# Altium PCB PCB1.PcbDoc (part 1 of 3)
Units mm, origin at the board's own origin, x right, y up, seen from the top; angles counter-clockwise.
Board outline 160 x 120 mm, 2 copper layers (Top Layer, Bottom Layer), stack 1.575 mm thick; 297 components, 194 nets, 893 pads, 504 vias.
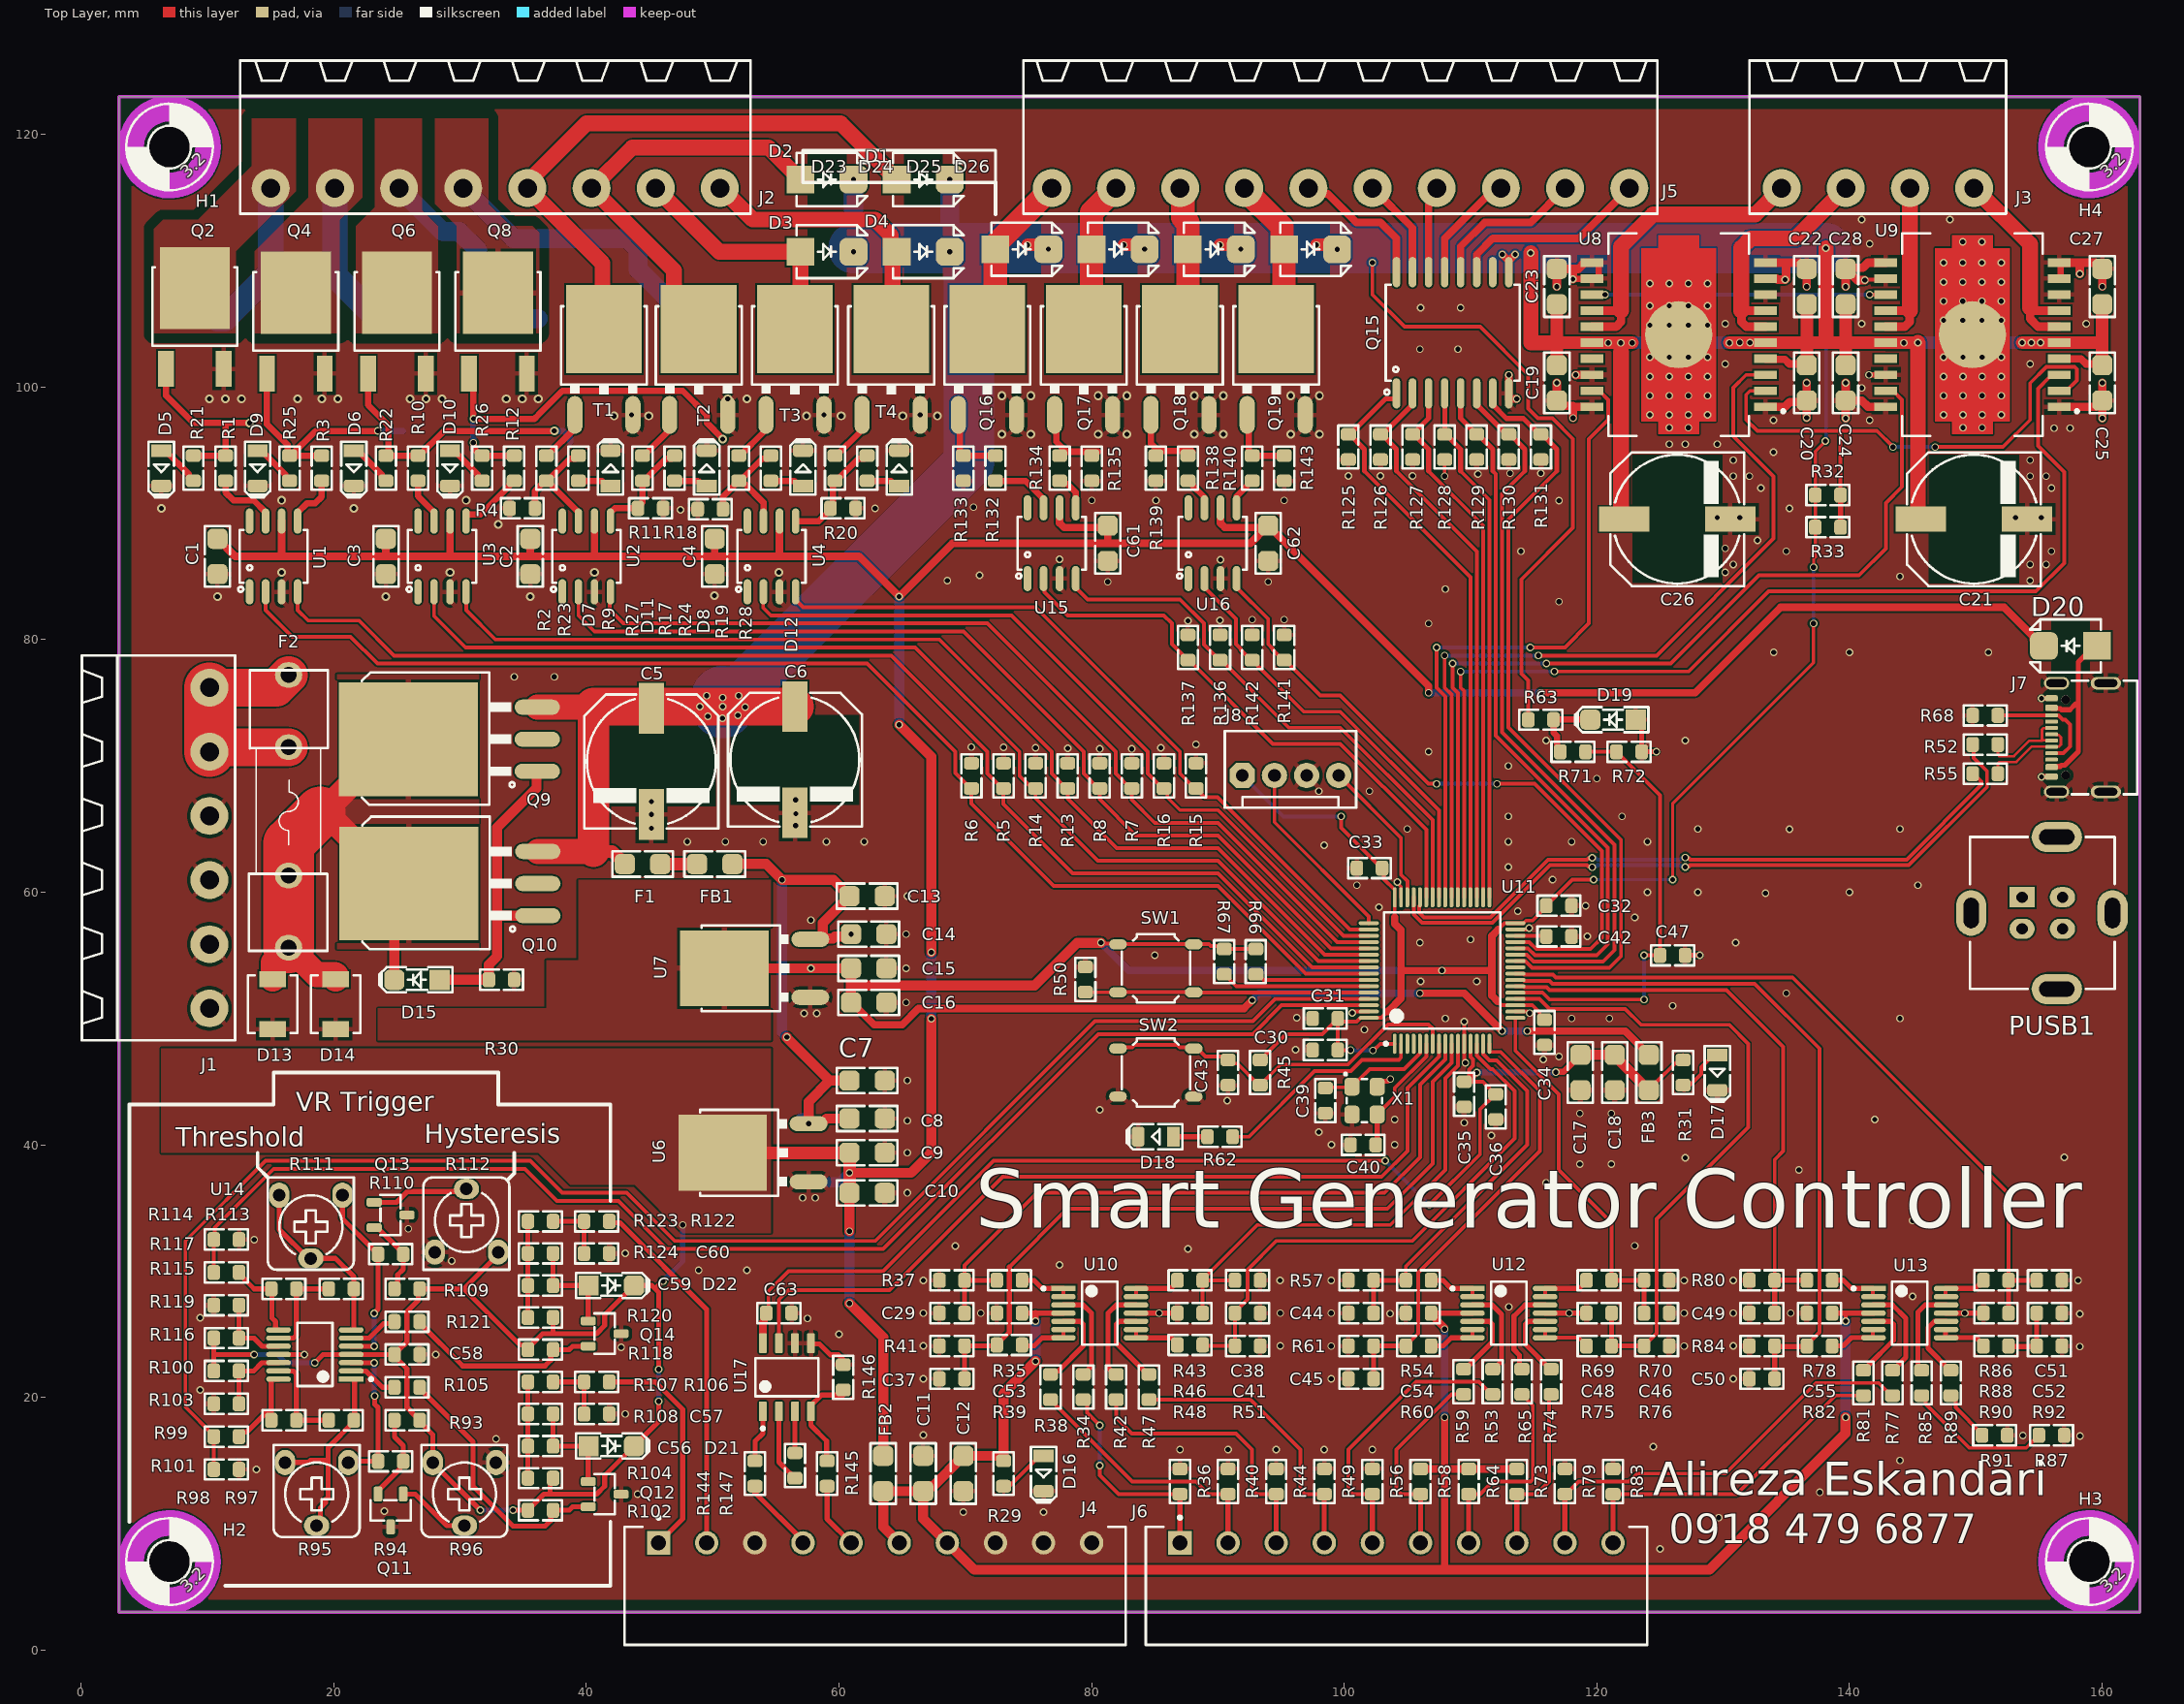
[diagram p0: Top Layer view]
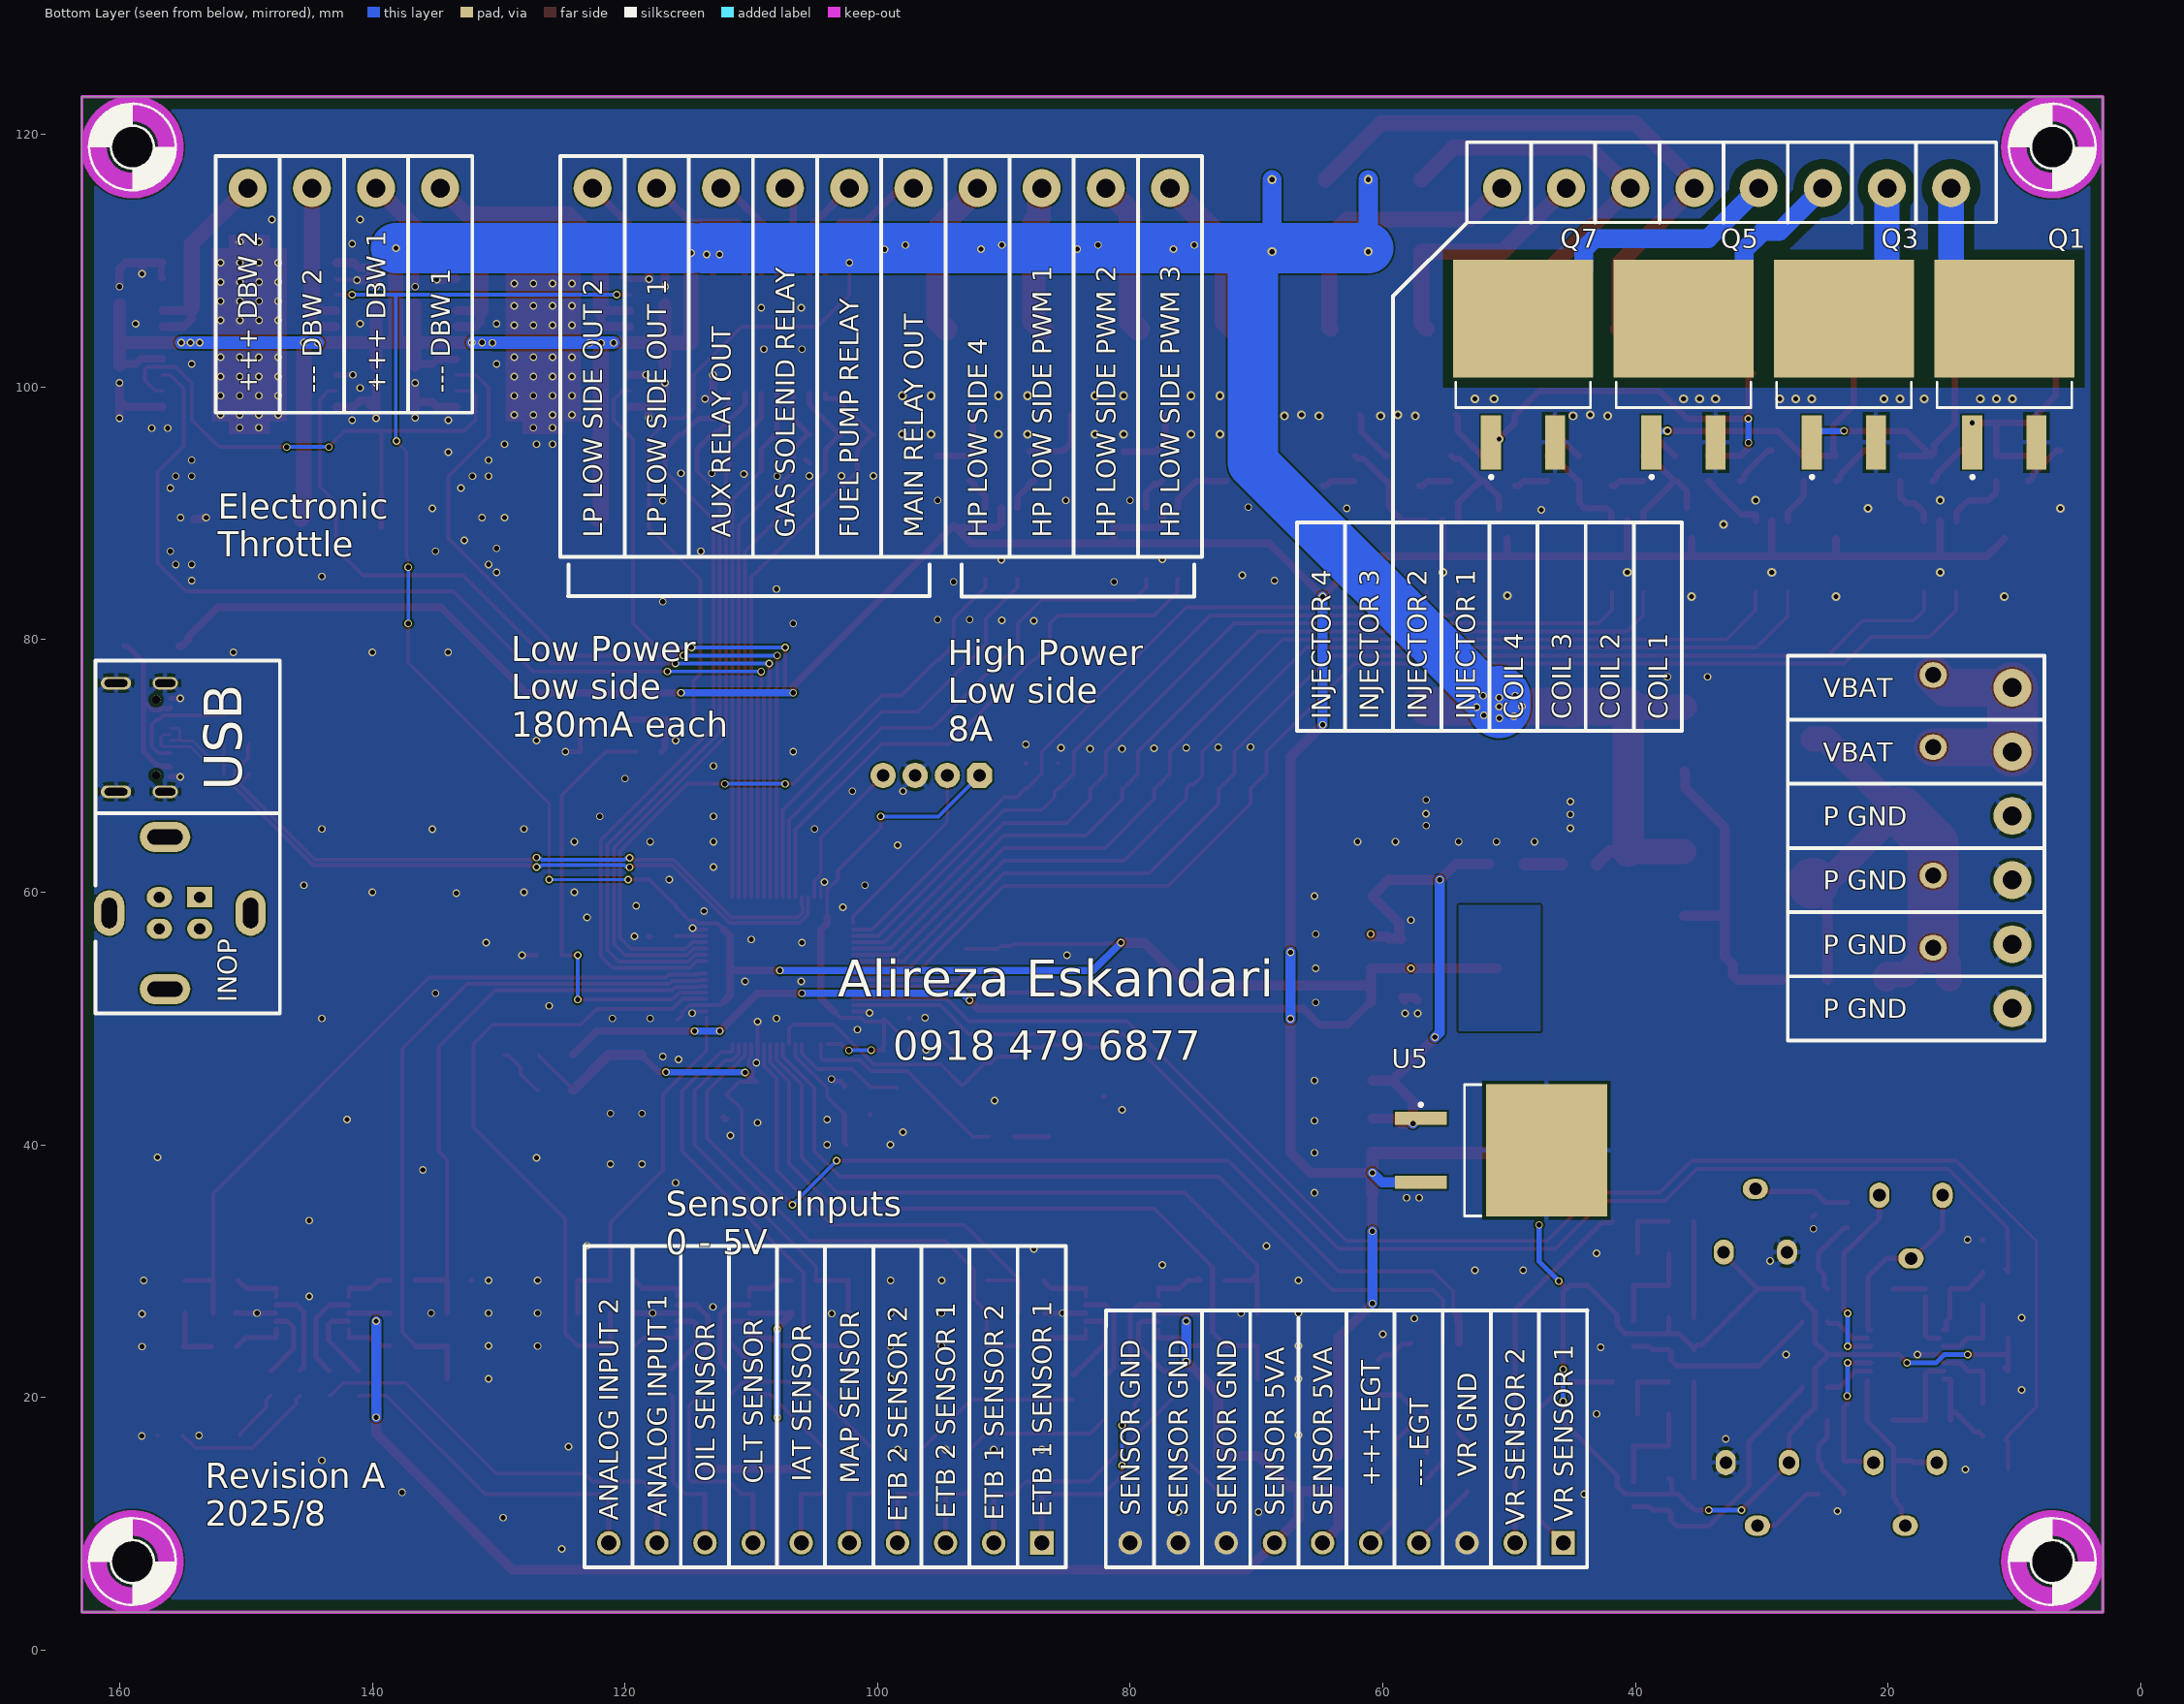
[diagram p1: Bottom Layer view, seen from below]
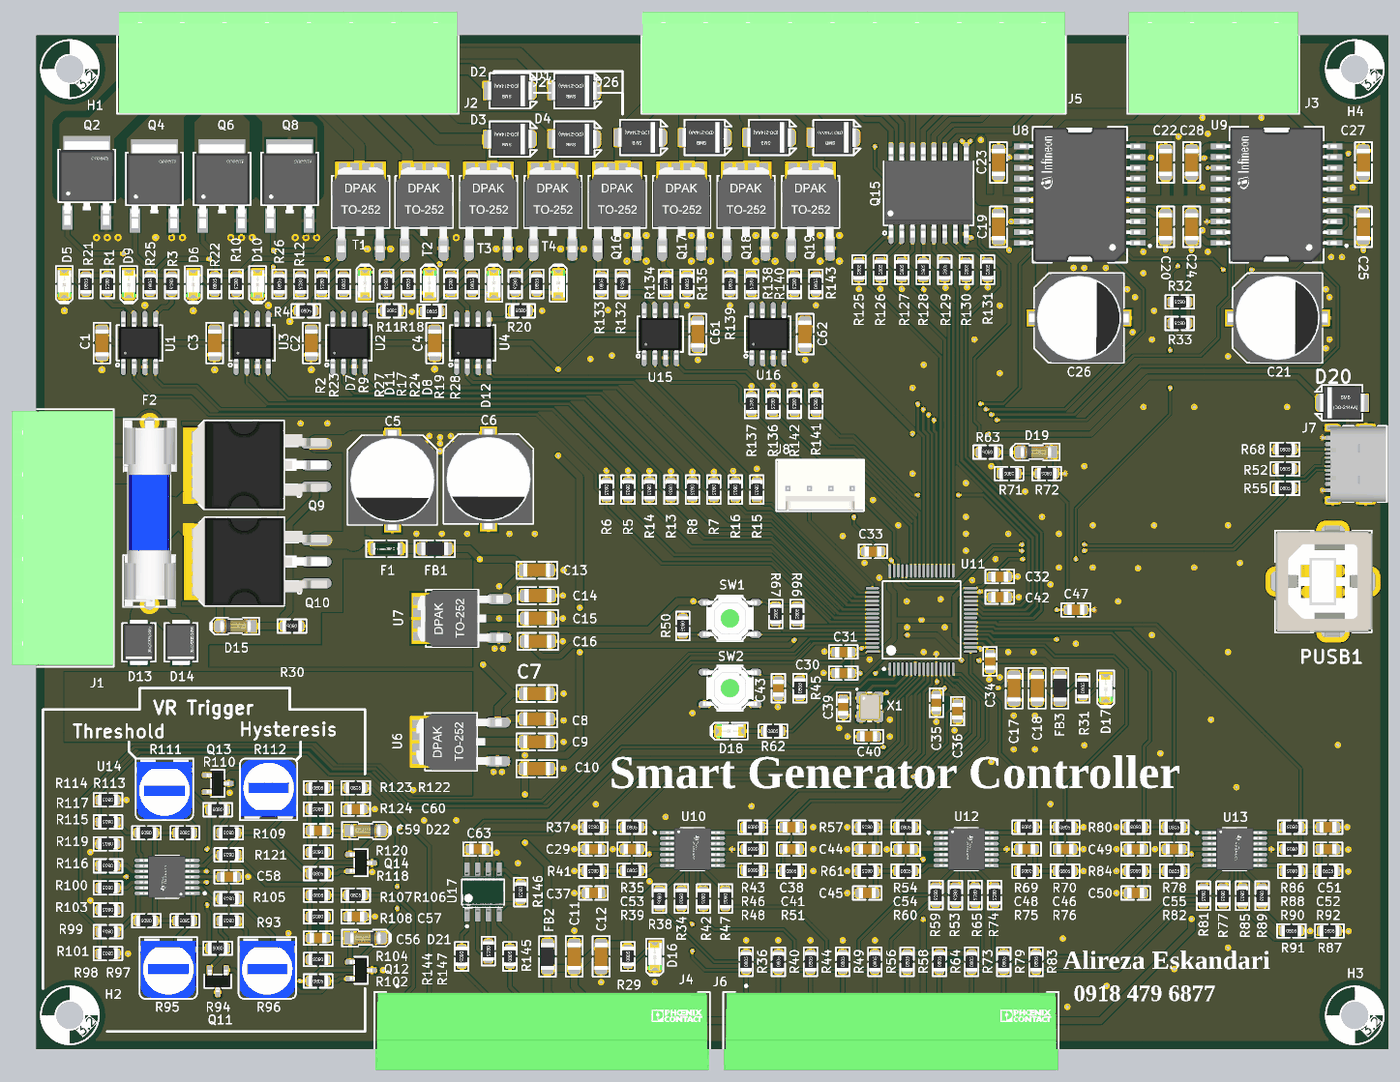
[diagram p4: 3D render of the assembled board from above, using the file's embedded part models]
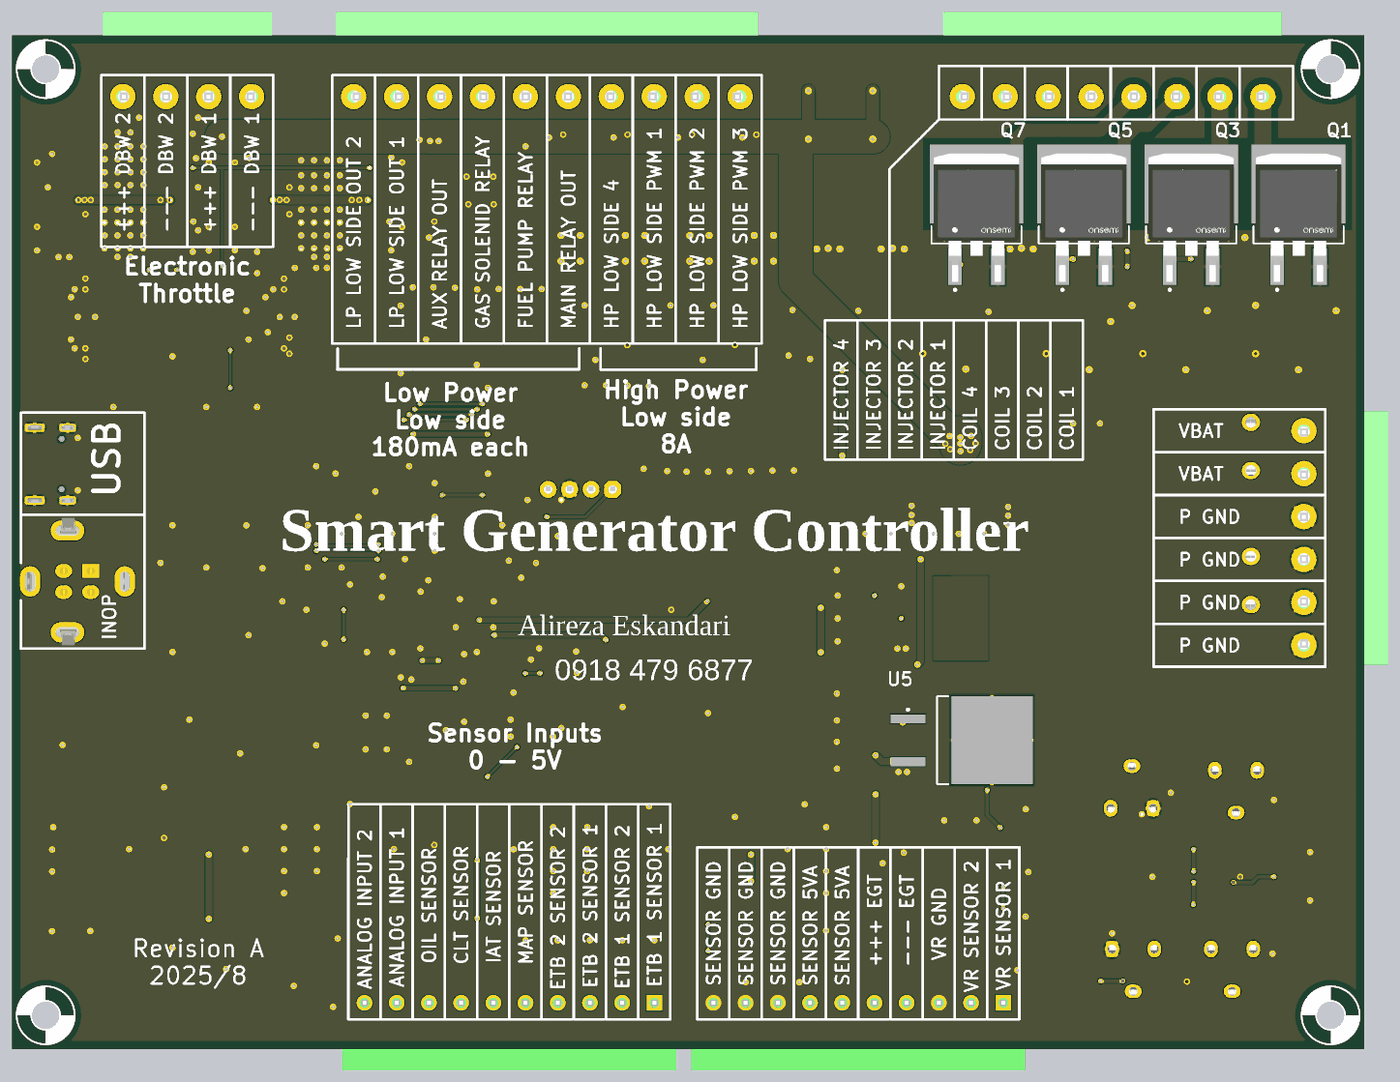
[diagram p5: 3D render of the assembled board from below, using the file's embedded part models]

## Layer stack, top to bottom
Top Solder: solder mask 0.0102, Solder Resist, Dk 3.5
Top Layer: signal copper 0.0254
Dielectric 1: dielectric 1.524, FR-4, Dk 4.8
Bottom Layer: signal copper 0.0254
Bottom Solder: solder mask 0.0102, Solder Resist, Dk 3.5

## Board outline
3,3 3,123 163,123 163,3

## Design rules (kind name [scope] priority, off if disabled: settings)
BoardOutlineClearance [All] p1: gap=0.2 ignorepadtopadclearanceinfootprint=FALSE
Clearance Clearance_HV [InNetClass('HV')] p1: gap=0.8 ignorepadtopadclearanceinfootprint=FALSE
Clearance [All] p2: gap=0.127 ignorepadtopadclearanceinfootprint=FALSE except(0.25: Arc-Hole Track-Hole SMDPad-Hole THPad-Hole Via-Hole Fill-Hole Poly-Hole Region-Hole Text-Hole)
ComponentClearance [All] p1: gap=0.127 collisioncheckmode=3 verticalgap=0.127 showdistances=TRUE
DiffPairsRouting [All] p1: maxlimit=0.254 minlimit=0.127 mostfreqgap=0.127 toplayer_minwidth=0.127 toplayer_maxwidth=25.4 toplayer_prefwidth=0.127 bottomlayer_minwidth=0.127 bottomlayer_maxwidth=25.4 bottomlayer_prefwidth=0.127 maxuncoupledlength=12.7
Height [All] p1: minheight=0 maxheight=1816.048 prefheight=12.7
HoleSize [All] p1: absolutevalues=TRUE maxlimit=6.3 minlimit=0.3 maxpercent=80.000 minpercent=20.000
HoleToHoleClearance [All] p1: gap=0.25 allowstackedmicrovias=FALSE
MinimumAnnularRing [All] p1: minimumring=0.076
MinimumSolderMaskSliver [All] p1: minsoldermaskwidth=0
PlaneClearance [All] p1: clearance=0.127
PlaneConnect PlaneConnectPowerPads [InPadClass('PowerPads')] p1: planeconnectstyle=Direct reliefexpansion=0.508 reliefentries=4 reliefconductorwidth=0.254 reliefairgap=0.254
PlaneConnect [All] p2: pad.planeconnectstyle=Relief pad.reliefexpansion=0.3 pad.reliefentries=4 pad.reliefconductorwidth=0.127 pad.reliefairgap=0.127 via.planeconnectstyle=Direct via.reliefexpansion=0.3 via.reliefentries=4 via.reliefconductorwidth=0.127 via.reliefairgap=0.127
PolygonConnect PolygonConnectDirect [InPadClass('Heat Generating') OR InComponentClass('Direct Connect Connectors')] p1: connectstyle=Direct reliefconductorwidth=0.254 reliefentries=4 polygonreliefangle="90 Angle" airgapwidth=0.254
PolygonConnect [All] p2: thpad.connectstyle=Relief thpad.reliefconductorwidth=0.381 thpad.reliefentries=4 thpad.polygonreliefangle="90 Angle" thpad.airgapwidth=0.254 thpad.conductorbypadedge=TRUE thpad.mindistance=0.381 thpad.enablemindistance=TRUE smdpad.connectstyle=Relief smdpad.reliefconductorwidth=0.381 smdpad.reliefentries=4 smdpad.polygonreliefangle="90 Angle" smdpad.airgapwidth=0.254 smdpad.conductorbypadedge=TRUE smdpad.mindistance=0.381 smdpad.enablemindistance=TRUE via.connectstyle=Direct via.reliefconductorwidth=0.127 via.reliefentries=4 via.polygonreliefangle="90 Angle" via.airgapwidth=0.127
RoutingVias [All] p1: holewidth=0.4 width=0.7 viastyle="Through Hole" minholewidth=0.3 minwidth=0.6 maxholewidth=0.6 maxwidth=6.6
SilkToSilkClearance [All] p1: silktosilkclearance=0
SilkToSolderMaskClearance [IsPad] p1: minsilkscreentomaskgap=0.127 clearancetoexposedcopper=TRUE
SolderMaskExpansion [All] p1: expansion=0.075 istentingtop=FALSE
SupplyNets "Schematic Supply Nets_5" [InNet('5V')] p1: voltage=0.000
SupplyNets "Schematic Supply Nets_4" [InNet('3.3V')] p2: voltage=0.000
SupplyNets "Schematic Supply Nets_3" [InNet('3.3VA')] p3: voltage=0.000
SupplyNets "Schematic Supply Nets_2" [InNet('GND')] p4: voltage=0.000
SupplyNets "Schematic Supply Nets_1" [InNet('5VA')] p5: voltage=0.000
SupplyNets "Schematic Supply Nets" [InNet('VBAT')] p6: voltage=0.000
Width [All] p1: maxlimit=25.4 minlimit=0.127 preferedwidth=0.127 minimp=50.000000 maximp=50.000000 favimp=50.000000
20 further rules are at their usual default settings.

## Classes and differential pairs
component class "Direct Connect Connectors": J2 J3 J4
net class HV: "IGN OUT 1" "IGN OUT 2" "IGN OUT 3" "IGN OUT 4"
pad class "Heat Generating": Q2-4 Q4-4 Q6-4 U6-4 U8-4
component class U_trigger_interface: C56 C57 C58 C59 C60 D21 D22 Q11 Q12 Q13 Q14 R93 R94 R95 R96 R97 R98 R99 R100 R101 R102 R103 R104 R105 R106 R107 R108 R109 R110 R111 R112 R113 R114 R115 R116 R117 R118 R119 R120 R121 R122 R123 R124 U14
component class U_power: C5 C6 C7 C8 C9 C10 C11 C12 C13 C14 C15 C16 C17 C18 D13 D14 D15 D16 D17 F1 F2 FB1 FB2 FB3 Q9 Q10 R29 R30 R31 U5 U6 U7
component class U_output_drivers: C61 C62 D23 D24 D25 D26 Q15 Q16 Q17 Q18 Q19 R125 R126 R127 R128 R129 R130 R131 R132 R133 R134 R135 R136 R137 R138 R139 R140 R141 R142 R143 U15 U16
component class U_exhaust_gas_temp_oxy: C63 R144 R145 R146 R147 U17
component class U_etb_driver: C19 C20 C21 C22 C23 C24 C25 C26 C27 C28 R32 R33 U8 U9
component class U_coil_inj_drivers: C1 C2 C3 C4 D1 D2 D3 D4 D5 D6 D7 D8 D9 D10 D11 D12 Q1 Q2 Q3 Q4 Q5 Q6 Q7 Q8 R1 R2 R3 R4 R5 R6 R7 R8 R9 R10 R11 R12 R13 R14 R15 R16 R17 R18 R19 R20 R21 R22 R23 R24 R25 R26 R27 R28 T1 T2 T3 T4 U1 U2 U3 U4
component class U_brain: C29 C30 C31 C32 C33 C34 C35 C36 C37 C38 C39 C40 C41 C42 C43 C44 C45 C46 C47 C48 C49 C50 C51 C52 C53 C54 C55 D18 D19 D20 J7 J8 PUSB1 R34 R35 R36 R37 R38 R39 R40 R41 R42 R43 R44 R45 R46 R47 R48 R49 R50 R51 R52 R53 R54 R55 R56 R57 R58 R59 R60 R61 R62 R63 R64 R65 R66 R67 R68 R69 R70 R71 R72 R73 R74 R75 R76 R77 R78 R79 R80 R81 R82 R83 R84 R85 R86 R87 R88 R89 R90 R91 R92 SW1 SW2 U10 U11 U12 U13 X1
component class mainboard: H1 H2 H3 H4 J1 J2 J3 J4 J5 J6
differential pair USB: +USB_P -USB_N
differential pair USB_D: +USB_D_P -USB_D_N

## Components (designator, comment, footprint, x,y, rotation, side; value= is the part's Value field where it differs from the comment)
C1 "100nF" C1206 10.795,86.585 r90 top
C2 "100nF" C1206 35.56,86.585 r90 top
C3 "100nF" C1206 24.13,86.585 r90 top
C4 "100nF" C1206 50.165,86.585 r90 top
C5 "470uF" C_EL_D10L10 45.148,70.358 r270 top
C6 "470uF" C_EL_D10L10 56.515,70.485 r270 top
C7 "10uF" C1206 62.23,45.085 r180 top
C8 "100nF" C1206 62.23,42.078 r180 top
C9 "100nF" C1206 62.23,39.37 r180 top
C10 "10uF" C1206 62.23,36.195 r180 top
C11 "10uF" C1206 66.675,13.97 r270 top
C12 "100nF" C1206 69.85,13.97 r90 top
C13 "10uF" C1206 62.23,59.69 r180 top
C14 "100nF" C1206 62.357,56.683 r180 top
C15 "100nF" C1206 62.357,53.975 r180 top
C16 "10uF" C1206 62.357,51.267 r180 top
C17 "10uF" C1206 118.707,45.72 r90 top
C18 "100nF" C1206 121.415,45.72 r90 top
C19 "100nF" C1206 116.84,100.33 r90 top
C20 "100nF" C1206 136.618,100.33 r90 top
C21 "470uF" C_EL_D10L10 149.86,89.535 r0 top
C22 "100nF" C1206 136.618,107.95 r270 top
C23 "100nF" C1206 116.84,107.95 r270 top
C24 "100nF" C1206 139.7,100.33 r90 top
C25 "100nF" C1206 160.02,100.33 r90 top
C26 "470uF" C_EL_D10L10 126.365,89.535 r0 top
C27 "100nF" C1206 160.02,107.95 r270 top
C28 "100nF" C1206 139.7,107.95 r270 top
C29 "100nF" C0805 68.945,26.67 r0 top
C30 "10uF" C0805 98.5,47.5 r0 top
C31 "100nF" C0805 98.5,50 r0 top
C32 "100nF" C0805 117,58.933 r180 top
C33 "100nF" C0805 102,61.91 r0 top
C34 "100nF" C0805 115.86,48.895 r90 top
C35 "100nF" C0805 109.5,44 r90 top
C36 "10uF" C0805 112,43 r90 top
C37 "100nF" C0805 68.945,21.47 r0 top
C38 "100nF" C0805 92.345,29.27 r180 top
C39 "33pF" C0805 98.5,43.5 r90 top
C40 "33pF" C0805 101.5,40 r0 top
C41 "100nF" C0805 92.345,26.67 r180 top
C42 "2.2uF" C0805 117,56.5 r180 top
C43 "100nF" C0805 90.805,45.72 r90 top
C44 "100nF" C0805 101.33,26.67 r0 top
C45 "100nF" C0805 101.33,21.47 r0 top
C46 "100nF" C0805 124.73,26.67 r180 top
C47 "10nF" C0805 126,55 r180 top
C48 "100nF" C0805 120.18,26.67 r0 top
C49 "100nF" C0805 133.08,26.67 r0 top
C50 "100nF" C0805 133.08,21.47 r0 top
C51 "100nF" C0805 155.83,29.27 r180 top
C52 "100nF" C0805 155.83,26.67 r180 top
C53 "100nF" C0805 73.495,26.67 r0 top
C54 "100nF" C0805 105.88,26.67 r0 top
C55 "100nF" C0805 137.63,26.67 r0 top
C56 "10nF" C0805 36.37,16.145 r180 top
C57 "1nF" C0805 40.815,18.685 r180 top
C58 "100nF" C0805 25.8,23.394 r180 top
C59 "10nF" C0805 36.37,28.86 r180 top
C60 "1nF" C0805 40.815,31.4 r180 top
C61 "100nF" C1206 81.28,87.63 r90 top
C62 "100nF" C1206 93.98,87.63 r90 top
C63 "100nF" C0805 55.245,26.673 r180 top
D1 "SMBJ48CA" D_SMB 66.675,116.43 r0 top
D2 "SMBJ48CA" D_SMB 59.055,116.43 r0 top
D3 "SMBJ48CA" D_SMB 59.055,110.715 r0 top
D4 "SMBJ48CA" D_SMB 66.675,110.715 r0 top
D5 "LED1206YLW" LED1206YLW 6.35,93.57 r270 top
D6 "LED1206YLW" LED1206YLW 21.59,93.57 r270 top
D7 "LED1206RED" LED1206RED 41.91,93.57 r90 top
D8 "LED1206RED" LED1206RED 57.15,93.57 r90 top
D9 "LED1206YLW" LED1206YLW 13.97,93.57 r270 top
D10 "LED1206YLW" LED1206YLW 29.21,93.57 r270 top
D11 "LED1206RED" LED1206RED 49.53,93.57 r90 top
D12 "LED1206RED" LED1206RED 64.77,93.57 r90 top
D13 "20V" FP-SMBJ-CA-MFG 15.162,51.137 r90 top
D14 "20V" FP-SMBJ-CA-MFG 20.152,51.137 r90 top
D15 "15V" D_SOD80 26.592,53.065 r180 top
D16 "LED1206GRN" LED1206GRN 76.2,13.97 r270 top
D17 "LED1206GRN" LED1206GRN 129.54,45.72 r270 top
D18 "LED1206GRN" LED1206GRN 85.09,40.64 r180 top
D19 "1N4148" D_SOD80 121.285,73.66 r180 top
D20 "SS34" D_SMB 157.5,79.5 r180 top
D21 "1N4148" D_SOD80 41.98,16.145 r0 top
D22 "1N4148" D_SOD80 41.98,28.86 r0 top
D23 "SS34" D_SMB 74.48,110.91 r0 top
D24 "SS34" D_SMB 82.1,110.91 r0 top
D25 "SS34" D_SMB 89.72,110.91 r0 top
D26 "SS34" D_SMB 97.34,110.9 r0 top
F1 "FUSE2A_1206" F1206 44.45,62.23 r0 top
F2 "F=15 A" "FUSE - Double PAD" 16.432,66.4 r270 top
FB1 "FB603" L1206 50.165,62.23 r180 top
FB2 "FB603" L1206 63.5,13.97 r90 top
FB3 "FB603" L1206 124.123,45.72 r90 top
H1 "HOLE" P3.2 7,119 r0 top
H2 "HOLE" P3.2 7,7 r0 top
H3 "HOLE" P3.2 159,7 r0 top
H4 "HOLE" P3.2 159,119 r0 top
J1 "CONN_TB6" MSTB_6 10.16,63.5 r90 top
J2 "CONN_TB8" MSTB_8 32.79,115.75 r0 top
J3 "CONN_TB4" MSTB_4 142.25,115.75 r0 top locked
J4 "PHOENIX MINI 10P" CON_PHOENIX_MINI_10 62.865,5.08 r0 top locked
J5 "CONN_TB10" MSTB_10 99.71,115.75 r0 top locked
J6 "PHOENIX MINI 10P" CON_PHOENIX_MINI_10 104.14,5.08 r0 top locked
J7 "DX07S016JA1" USBC_SMD_16_DX07S016JA1 156,72.25 r270 top locked
J8 "CONN_SWD" WF_4 95.75,69.25 r0 top
PUSB1 "CONN_USB_B" USB_B_ST 155.27,58.352 r270 top
Q1 "ISL9V5045S3ST-F085" FP-418AJ-MFG 10.795,103.198 r180 bottom
Q2 "DNP" FP-369AS-MFG 9,106.37 r0 top
Q3 "ISL9V5045S3ST-F085" FP-418AJ-MFG 23.495,103.198 r180 bottom
Q4 "DNP" FP-369AS-MFG 17,106 r0 top
Q5 "ISL9V5045S3ST-F085" FP-418AJ-MFG 36.195,103.198 r180 bottom
Q6 "DNP" FP-369AS-MFG 25,106 r0 top
Q7 "ISL9V5045S3ST-F085" FP-418AJ-MFG 48.895,103.198 r180 bottom
Q8 "DNP" FP-369AS-MFG 33,106 r0 top
Q9 "AOD4185" D2PAK_3 36.117,72.115 r90 top
Q10 "AOD4185" D2PAK_3 36.157,60.685 r90 top
Q11 "S8550" SOT23_3 24.5,11.044 r270 top
Q12 "S8550" SOT23_3 41.45,12.335 r0 top
Q13 "S8550" SOT23_3 24.5,34.444 r0 top
Q14 "S8550" SOT23_3 41.45,25.05 r0 top
Q15 "ULN2003" SO_16_W 108.585,104.295 r90 top locked
Q16 "IRFR3709" DPAK_3 71.755,97.79 r0 top
Q17 "IRFR3709" DPAK_3 79.375,97.79 r0 top
Q18 "IRFR3709" DPAK_3 86.995,97.79 r0 top
Q19 "IRFR3709" DPAK_3 94.615,97.79 r0 top
R1 "0R" R0805 11.43,93.57 r270 top
R2 "100R" R0805 36.83,93.57 r270 top
R3 "0R" R0805 19.05,93.57 r270 top
R4 "4.7K" R0805 34.925,90.395 r0 top
R5 "4.7K" R0805 73.025,69.215 r270 top
R6 "4.7K" R0805 70.485,69.215 r270 top
R7 "4.7K" R0805 83.185,69.215 r270 top
R8 "4.7K" R0805 80.645,69.215 r270 top
R9 "100R" R0805 44.45,93.57 r270 top
R10 "0R" R0805 26.67,93.57 r270 top
R11 "4.7K" R0805 45.085,90.395 r180 top
R12 "0R" R0805 34.29,93.57 r270 top
R13 "4.7K" R0805 78.105,69.215 r270 top
R14 "4.7K" R0805 75.565,69.215 r270 top
R15 "4.7K" R0805 88.265,69.215 r270 top
R16 "4.7K" R0805 85.725,69.215 r270 top
R17 "100R" R0805 52.07,93.57 r270 top
R18 "4.7K" R0805 49.816,90.322 r0 top
R19 "100R" R0805 59.69,93.57 r270 top
R20 "4.7K" R0805 60.325,90.395 r180 top
R21 "4.7K" R0805 8.89,93.57 r90 top
R22 "4.7K" R0805 24.13,93.57 r90 top
R23 "4.7K" R0805 39.37,93.57 r90 top
R24 "4.7K" R0805 54.61,93.57 r90 top
R25 "4.7K" R0805 16.51,93.57 r90 top
R26 "4.7K" R0805 31.75,93.57 r90 top
R27 "4.7K" R0805 46.99,93.57 r90 top
R28 "4.7K" R0805 62.23,93.57 r90 top
R29 "4.7K" R0805 73.025,13.97 r90 top
R30 "10K" R0805 33.281,53.065 r180 top
R31 "4.7K" R0805 126.832,45.72 r90 top
R32 "47K" R0805 138.295,91.44 r180 top
R33 "47K" R0805 138.295,88.9 r180 top
R34 "4.7K" R0805 79.345,20.82 r270 top
R35 "4.7K" R0805 73.495,29.27 r0 top
R36 "1M" R0805 86.995,13.335 r90 top
R37 "9.1K" R0805 68.945,29.27 r180 top
R38 "4.7K" R0805 76.745,20.82 r270 top
R39 "4.7K" R0805 73.495,24.152 r0 top
R40 "1M" R0805 90.805,13.335 r90 top
R41 "9.1K" R0805 68.945,24.07 r180 top
R42 "4.7K" R0805 81.945,20.82 r270 top
R43 "4.7K" R0805 87.795,29.27 r180 top
R44 "1M" R0805 94.615,13.335 r90 top
R45 "4.7K" R0805 93.345,45.72 r90 top
R46 "9.1K" R0805 87.795,26.67 r180 top
R47 "4.7K" R0805 84.545,20.82 r270 top
R48 "4.7K" R0805 87.795,24.155 r180 top
R49 "1M" R0805 98.425,13.335 r90 top
R50 "4.7K" R0805 79.502,53.086 r270 top
R51 "9.1K" R0805 92.345,24.07 r0 top
R52 "22R" R0805 150.75,71.692 r0 top
R53 "4.7K" R0805 111.763,21.236 r270 top
R54 "4.7K" R0805 105.88,29.27 r0 top
R55 "22R" R0805 150.75,69.383 r0 top
R56 "1M" R0805 102.235,13.335 r90 top
R57 "9.1K" R0805 101.33,29.27 r180 top
R58 "4.7K" R0805 106.045,13.335 r90 top
R59 "4.7K" R0805 109.455,21.236 r270 top
R60 "4.7K" R0805 105.88,24.07 r0 top
R61 "9.1K" R0805 101.33,24.07 r180 top
R62 "4.7K" R0805 90.17,40.64 r0 top
R63 "4.7K" R0805 115.57,73.66 r180 top
R64 "4.7K" R0805 109.855,13.335 r90 top
R65 "4.7K" R0805 114.072,21.236 r270 top
R66 "4.7k" R0805 93,54.5 r90 top
R67 "4.7k" R0805 90.5,54.5 r90 top
R68 "5.1K" R0805 150.75,74 r0 top
R69 "4.7K" R0805 120.18,29.27 r180 top
R70 "9.1K" R0805 124.73,29.27 r0 top
R71 "4.7K" R0805 118.11,71.12 r180 top
R72 "1K" R0805 122.555,71.12 r180 top
R73 "4.7K" R0805 113.665,13.335 r90 top
R74 "4.7K" R0805 116.38,21.236 r270 top
R75 "4.7K" R0805 120.18,24.07 r180 top
R76 "9.1K" R0805 124.73,24.07 r0 top
R77 "4.7K" R0805 143.413,21.145 r270 top
R78 "4.7K" R0805 137.63,29.27 r0 top
R79 "1M" R0805 117.475,13.335 r90 top
R80 "9.1K" R0805 133.08,29.27 r180 top
R81 "4.7K" R0805 141.105,21.145 r270 top
R82 "4.7K" R0805 137.63,24.07 r0 top
R83 "1M" R0805 121.285,13.335 r90 top
R84 "9.1K" R0805 133.08,24.07 r180 top
R85 "4.7K" R0805 145.722,21.145 r270 top
R86 "4.7K" R0805 151.605,29.27 r180 top
R87 "1M" R0805 156,17 r0 top
R88 "9.1K" R0805 151.605,26.67 r180 top
R89 "4.7K" R0805 148.03,21.145 r270 top
R90 "4.7K" R0805 151.605,24.07 r180 top
R91 "1M" R0805 151.5,17 r0 top
R92 "9.1K" R0805 155.83,24.07 r0 top
R93 "10K" R0805 25.8,18.194 r180 top
R94 "10K" R0805 24.5,14.944 r180 top
R95 "POT100K" POT_7X5 18.65,12.344 r180 top
R96 "POT10K" POT_7X5 30.35,12.344 r180 top
R97 "100K" R0805 20.6,18.194 r180 top
R98 "100K" R0805 16.05,18.194 r180 top
R99 "9.1K" R0805 11.5,16.894 r180 top
R100 "10K" R0805 11.5,22.094 r180 top
R101 "4.7K" R0805 11.5,14.294 r180 top
R102 "10K" R0805 36.37,11.065 r0 top
R103 "10K" R0805 11.5,19.494 r180 top
R104 "1M" R0805 36.37,13.605 r180 top
R105 "10K" R0805 25.8,20.794 r180 top
R106 "10K" R0805 40.815,21.225 r0 top
R107 "10K" R0805 36.37,21.225 r0 top
R108 "47K" R0805 36.37,18.685 r180 top
R109 "10K" R0805 25.8,28.594 r180 top
R110 "10K" R0805 24.5,31.336 r180 top
R111 "POT100K" POT_7X5 18.188,33.503 r180 top
R112 "POT10K" POT_7X5 30.508,34.003 r0 top
R113 "100K" R0805 20.6,28.594 r180 top
R114 "100K" R0805 16.05,28.594 r180 top
R115 "9.1K" R0805 11.5,29.894 r180 top
R116 "10K" R0805 11.5,24.694 r180 top
R117 "4.7K" R0805 11.5,32.494 r180 top
R118 "10K" R0805 36.37,23.78 r0 top
R119 "10K" R0805 11.5,27.294 r180 top
R120 "1M" R0805 36.37,26.32 r180 top
R121 "10K" R0805 25.8,25.994 r180 top
R122 "10K" R0805 40.815,33.94 r0 top
R123 "10K" R0805 36.37,33.94 r0 top
R124 "47K" R0805 36.37,31.4 r180 top
R125 "4.7K" R0805 100.33,95.25 r90 top
R126 "4.7K" R0805 102.87,95.25 r90 top
R127 "4.7K" R0805 105.41,95.25 r90 top
R128 "4.7K" R0805 107.95,95.25 r90 top
R129 "4.7K" R0805 110.49,95.25 r90 top
R130 "4.7K" R0805 113.03,95.25 r90 top
R131 "4.7K" R0805 115.57,95.25 r90 top
R132 "100R" R0805 72.39,93.57 r270 top
R133 "4.7K" R0805 69.85,93.57 r90 top
R134 "100R" R0805 77.47,93.57 r270 top
R135 "4.7K" R0805 80.01,93.57 r90 top
R136 "4.7K" R0805 90.17,79.375 r270 top
R137 "4.7K" R0805 87.63,79.375 r270 top
R138 "100R" R0805 87.63,93.57 r270 top
R139 "4.7K" R0805 85.09,93.57 r90 top
R140 "100R" R0805 92.71,93.57 r270 top
R141 "4.7K" R0805 95.25,79.375 r270 top
R142 "4.7K" R0805 92.71,79.375 r270 top
R143 "4.7K" R0805 95.25,93.57 r90 top
R144 "10K" R0805 53.34,13.97 r270 top
R145 "10K" R0805 59.055,13.97 r90 top
R146 "10K" R0805 60.338,21.59 r270 top
R147 "1K" R0805 56.515,14.605 r270 top
SW1 "PUSHBUTTON" SWPBS_SPDT_5X5X1 85.09,53.975 r0 top
SW2 "PUSHBUTTON" SWPBS_SPDT_5X5X1 85.09,45.72 r0 top
T1 "NTD20N06" DPAK_3 41.389,97.79 r0 top
T2 "NTD20N06" DPAK_3 48.895,97.79 r0 top
T3 "NTD20N06" DPAK_3 56.515,97.79 r0 top
T4 "NTD20N06" DPAK_3 64.135,97.79 r0 top
U1 "TC4427" SO_8 15.24,86.585 r90 top
U2 "TC4427" SO_8 40.005,86.585 r90 top
U3 "TC4427" SO_8 28.575,86.585 r90 top
U4 "TC4427" SO_8 54.657,86.585 r90 top
U5 "L7805CD2T-TR" TO-263_M 50.646,39.56 r180 bottom
U6 "LD1086V50" DPAK_3 57.6,39.37 r90 top
U7 "LD1086V33" DPAK_3 57.727,53.975 r90 top
U8 "TLE72093RAUMA1" FP-PG-DSO-20-MFG 126.485,104.14 r180 top locked
U9 "TLE72093RAUMA1" FP-PG-DSO-20-MFG 149.74,104.14 r180 top locked
U10 "TLV9064IPWR" TTSOP-14 80.645,26.67 r0 top
U11 "STM32F401RCT6" STM-LQFP64_L 107.75,53.8 r90 top locked
U12 "TLV9064IPWR" TTSOP-14 113.03,26.67 r0 top
U13 "TLV9064IPWR" TTSOP-14 144.78,26.67 r0 top
U14 "TLV9064IPWR" TTSOP-14 18.505,23.394 r180 top
U15 "TC4427" SO_8 76.835,87.63 r90 top
U16 "TC4427" SO_8 89.572,87.63 r90 top
U17 "INA826AIDR" SOIC-8 55.88,21.59 r90 top
X1 "XTL_25MHz" XTL_4_3225 101.61,43.5 r0 top

## Footprints (in the part's own frame and the unit in brackets; to place one, negate y for a bottom-side part, rotate by r counter-clockwise, add the part's x,y. Pads: shape width x height; smd on the part's side, far side on the other; paste and mask are expansions set on the pad)
C0805 [mm] "CHIP Capacitor, 2.0X1.3mm, 0805"
  rrect50% 1x1.2 smd paste-0.1 mask+0.075: 1(-1,0) 2(1,0)
  Top Layer pour cut-out: -0.5,0.8 0.5,0.8 0.5,-0.8 -0.5,-0.8
  silkscreen extent -1.7,-0.8 1.7,0.8, body extent -1,-0.62 1,0.63, height 1
C1206 [mm] "CHIP Capacitor, 3.2X1.6mm, 1206"
  rrect50% 1.6x1.6 smd paste-0.8 mask+0.075: 1(-1.4,0) 2(1.4,0)
  Top Layer pour cut-out: -0.8,1 -0.8,-1 0.8,-1 0.8,1
  silkscreen extent -2.4,-1 2.4,1, body extent -1.6,-0.8 1.6,0.8, height 1
C_EL_D10L10 [mm] "Electrolytic Cap, 10.3mm, L: 10mm"
  rect 4x2 smd paste-0.215: 1(-4.2,0) 2(4.2,0)
  Top Layer pour cut-out: -3.556,5.08 -3.556,-5.08 3.556,-5.08 3.556,5.08
  silkscreen extent -5.3,-5.3 5.3,5.3, body extent -5.9,-5.25 5.9,5.25, height 10.5
CON_PHOENIX_MINI_10 [mm]
  rect 1.85x1.85 hole 1.2 paste-2539.97 mask+0: 1(-17.145,3.4)
  round 1.85 hole 1.2 paste-2539.97 mask+0: 2(-13.335,3.4) 3(-9.525,3.4) 4(-5.715,3.4) 5(-1.905,3.4) 6(1.905,3.4) 7(5.715,3.4) 8(9.525,3.4) 9(13.335,3.4) 10(17.145,3.4)
  silkscreen extent -19.85,-4.68 19.85,5.52, body extent -19.94,-4.77 19.94,4.77, height 0.25
D2PAK_3 [mm] "D2-PAK, 4-Pads, Body 7.6x8.6mm"
  oval 1.2x3.6 smd: 1(-2.54,0) 2(0,0) 3(2.54,0)
  rect 9x11 smd paste-6: 4(0,10.2)
  silkscreen extent -5.2,1.8 5.3,13.9, body extent -5.17,-1.25 5.23,14.6, height 4.6
D_SMB [mm] "SMB Molded Diode, 2-Leads, Body 4.3x3.5mm"
  rect 2.2x2.2 smd paste-0.1: 1(-2.1,0)
  rrect50% 2.2x2.2 smd paste-0.1: 2(2.1,0)
  Top Layer pour cut-out: -1.524,2.1 -1.524,-2.1 1.524,-2.1 1.524,2.1
  silkscreen extent -2.4,-2.1 3.2,2.1, body extent -2.75,-1.95 2.75,1.95, height 2.45
D_SOD80 [mm] "SOD-80 MINI-MELF 3.6X1.6mm, LL-34, LL4148"
  rect 1.6x1.6 smd paste-0.1: 1(-1.8,0)
  rrect50% 1.6x1.6 smd paste-0.1: 2(1.8,0)
  Top Layer pour cut-out: -1.016,1.016 1.016,1.016 1.016,-1.016 -1.016,-1.016
  silkscreen extent -2.8,-1 3,1, body extent -1.85,-0.79 1.85,0.79, height 1.6
DPAK_3 [mm] "D-PAK (TO-252), 3-Pads, Body 6.2x6.7mm"
  oval 1.2x3 smd: 1(-2.3,0) 3(2.3,0)
  rect 6x7 smd paste-5: 4(0,6.8)
  silkscreen extent -3.4,1.63 3.4,8.6, body extent -3.37,-0.5 3.37,9.6, height 2.37
F1206 [mm] "FUSE, 1206, 3.2x1.6mm"
  rrect50% 1.6x1.6 smd paste-2 mask+0.075: 1(-1.4,0) 2(1.4,0)
  Top Layer pour cut-out: -0.8,1 -0.8,-1 0.8,-1 0.8,1
  silkscreen extent -2.4,-1 2.4,1, body extent -1.6,-0.8 1.6,0.8, height 1
FP-369AS-MFG [mm]
  rect 1.25x2.85 smd paste+0 mask+0: 1(-2.286,-4.937) 3(2.286,-4.937)
  rect 5.55x6.5 smd paste+0 mask+0: 4(0,1.463)
  silkscreen extent -3.36,-3.11 3.37,3.11, body extent -3.46,-6.46 3.46,4.81, height 0.25
FP-418AJ-MFG [mil]
  rect 63x169 smd paste+0 mask+0: 1(-100,-298.4) 3(100,-298.4)
  rect 436x366 smd paste+0 mask+0: 4(0,87.1)
  silkscreen extent -210,-411 210,-111, body extent -200,-370 200,230, height 200
FP-PG-DSO-20-MFG [mm]
  rect 1.83x0.68 smd paste+0 mask+0: 1(-6.865,5.715) 2(-6.865,4.445) 3(-6.865,3.175) 4(-6.865,1.905) 5(-6.865,0.635) 6(-6.865,-0.635) 7(-6.865,-1.905) 8(-6.865,-3.175) 9(-6.865,-4.445) 10(-6.865,-5.715) 11(6.865,-5.715) 12(6.865,-4.445) 13(6.865,-3.175) 14(6.865,-1.905) 15(6.865,-0.635) 16(6.865,0.635) 17(6.865,1.905) 18(6.865,3.175) 19(6.865,4.445) 20(6.865,5.715)
  round 5.31 smd paste-1000 mask+0: 21(0,0)
  Top Layer region: -1.6,-7.87 1.6,-7.87 1.6,-6.85 2.95,-6.85 2.95,6.85 1.6,6.85 1.6,7.87 -1.6,7.87 -1.6,6.85 -2.95,6.85 -2.95,-6.85 -1.6,-6.85 -1.6,-7.87
  silkscreen extent -8.4,-8.02 5.57,8.02, body extent -7.88,-8.42 7.88,8.42, height 0.25
FP-SMBJ-CA-MFG [mm]
  rect 1.27x2.1 smd paste+0 mask+0: 1(-1.98,0) 2(1.98,0)
  silkscreen extent -2.28,-1.97 2.29,1.97, body extent -2.72,-2.07 2.72,2.07, height 0.25
"FUSE - Double PAD" [mil]
  oval 80x85 hole 50: 1(-425,0) 1(-200,0) 2(200,0) 2(425,0)
  silkscreen extent -440,-124 435,123, body extent -434,-121 436,125, height 378
L1206 [mm] "INDUCTOR, FERRITE BEAD, 1206, 3.2X1.6mm"
  rrect50% 1.6x1.6 smd paste-0.8 mask+0.075: 1(-1.4,0) 2(1.4,0)
  Top Layer pour cut-out: -0.8,1 -0.8,-1 0.8,-1 0.8,1
  silkscreen extent -2.4,-1 2.4,1, body extent -1.6,-0.8 1.6,0.8, height 1.1
LED1206GRN [mm] "LED, 1206, GREEN"
  rect 1x1.6 smd paste-0.2 mask+0.075: 1(-1.4,0)
  rrect50% 1x1.6 smd paste-0.2 mask+0.075: 2(1.4,0)
  Top Layer pour cut-out: -1.1,1.1 -1.1,-1.1 1.1,-1.1 1.1,1.1
  silkscreen extent -2.1,-1 2.3,1, body extent -1.6,-0.8 1.6,0.8, height 0.68
LED1206RED [mm] "LED, 1206, RED"
  rect 1x1.6 smd paste-0.2 mask+0.075: 1(-1.4,0)
  rrect50% 1x1.6 smd paste-0.2 mask+0.075: 2(1.4,0)
  Top Layer pour cut-out: -1.1,1.1 -1.1,-1.1 1.1,-1.1 1.1,1.1
  silkscreen extent -2.1,-1 2.3,1, body extent -1.6,-0.8 1.6,0.8, height 0.68
LED1206YLW [mm] "LED, 1206, YELLOW"
  rect 1x1.6 smd paste-0.2 mask+0.075: 1(-1.4,0)
  rrect50% 1x1.6 smd paste-0.2 mask+0.075: 2(1.4,0)
  Top Layer pour cut-out: -1.1,1.1 -1.1,-1.1 1.1,-1.1 1.1,1.1
  silkscreen extent -2.1,-1 2.3,1, body extent -1.6,-0.8 1.6,0.8, height 0.68
MSTB_4 [mm] "PHOENIX MSTB 2, 5-G, 5.08mm pitch"
  round 3 hole 1.5: 1(-7.62,0) 2(-2.54,0) 3(2.54,0) 4(7.62,0)
  silkscreen extent -10.16,-2.03 10.16,10.1, body extent -10,-2 10,10, height 8.6
MSTB_6 [mm] "PHOENIX MSTB 2, 5-G, 5.08mm pitch"
  round 3 hole 1.5: 1(-12.7,0) 2(-7.62,0) 3(-2.54,0) 4(2.54,0) 5(7.62,0) 6(12.7,0)
  silkscreen extent -15.24,-2.03 15.24,10.1, body extent -15,-2 15,10, height 8.6
MSTB_8 [mm] "PHOENIX MSTB 2, 5-G, 5.08mm pitch"
  round 3 hole 1.5: 1(-17.78,0) 2(-12.7,0) 3(-7.62,0) 4(-2.54,0) 5(2.54,0) 6(7.62,0) 7(12.7,0) 8(17.78,0)
  silkscreen extent -20.2,-2.03 20.2,10.1, body extent -20,-2 20,10, height 8.6
MSTB_10 [mm] "PHOENIX MSTB 2, 5-G, 5.08mm pitch"
  round 3 hole 1.5: 1(-22.86,0) 2(-17.78,0) 3(-12.7,0) 4(-7.62,0) 5(-2.54,0) 6(2.54,0) 7(7.62,0) 8(12.7,0) 9(17.78,0) 10(22.86,0)
  silkscreen extent -25.1,-2.03 25.1,10.1, body extent -25,-2 25,10, height 8.6
P3.2 [mm] "MOUNTING HOLE 3.2 mm with drill center"
  round 0 hole 3.2 unplated: MH(0,0)
  Keep-Out Layer circle w2.032: c0,0 r3.048
  silkscreen extent -3.43,-3.43 3.43,3.43
POT_7X5 [mm] "POT, TRIM, 7.5X5.0mm, pitch: 5.0mm"
  oval 1.6x2 hole 1: 1(-2.5,-2.5) 3(2.5,-2.5)
  oval 2x1.6 hole 1: 2(0,2.5)
  silkscreen extent -3.4,-3.9 3.4,3.4, body extent -3.25,-3.78 3.25,3.27, height 7
R0805 [mm] "CHIP RESISTOR 1/8 WATT ,2.0X1.3mm, 0805, 2012"
  rrect50% 1x1.2 smd paste-0.1 mask+0.075: 1(-1,0) 2(1,0)
  Top Layer pour cut-out: -0.5,0.8 0.5,0.8 0.5,-0.8 -0.5,-0.8
  silkscreen extent -1.7,-0.8 1.7,0.8, body extent -1.15,-0.67 1.15,0.68, height 0.76
SO_8 [mm] "SOP-8, 5x3.9mm body 1.27mm pitch, SOT96-1, M08A, S8, SOIC8, VO8, MS-012AA(JEDEC), R-8, 8S2, VOG8"
  oval 2x0.6 smd: 1(-2.8,1.905) 2(-2.8,0.635) 3(-2.8,-0.635) 4(-2.8,-1.905) 5(2.8,-1.905) 6(2.8,-0.635) 7(2.8,0.635) 8(2.8,1.905)
  silkscreen extent -2.8,-2.7 2.1,2.8, body extent -3,-2.45 3,2.45, height 1.7
SO_16_W [mm] "SOP, SOIC, 7.5mm width, 1.27mm pitch,"
  oval 2.4x0.6 smd: 1(-4.8,4.445) 2(-4.8,3.175) 3(-4.8,1.905) 4(-4.8,0.635) 5(-4.8,-0.635) 6(-4.8,-1.905) 7(-4.8,-3.175) 8(-4.8,-4.445) 9(4.8,-4.445) 10(4.8,-3.175) 11(4.8,-1.905) 12(4.8,-0.635) 13(4.8,0.635) 14(4.8,1.905) 15(4.8,3.175) 16(4.8,4.445)
  silkscreen extent -4.9,-5.3 3.8,5.4, body extent -5.21,-5.25 5.42,5.25, height 2.62
SOIC-8 [mm]
  rrect17% 1.55x0.6 smd paste+0 mask+0: 1(-2.7,1.905) 2(-2.7,0.635) 3(-2.7,-0.635) 4(-2.7,-1.905) 5(2.7,-1.905) 6(2.7,-0.635) 7(2.7,0.635) 8(2.7,1.905)
  silkscreen extent -4.17,-2.5 1.5,2.5, body extent -3.57,-2.75 3.57,2.75, height 0.25
SOT23_3 [mm] "SOT-23, Micro3, MO-178, TO-236AB, MO-193C, SuperSOT3, SC-59, 1.5x3mm, Pitch 1.9mm"
  rrect50% 1.2x0.7 smd paste-0.05 mask+0.1: 1(-1.3,1) 2(-1.3,-1) 3(1.3,0)
  silkscreen extent -0.8,-1.6 0.8,1.6, body extent -1.32,-1.5 1.32,1.5, height 1.08
STM-LQFP64_L [mm] "QFP, 64-Leads, Body 10x10mm, Pitch 0.5mm, IPC High Density"
  oval 1.6x0.3 smd: 1(-5.8,3.75) 2(-5.8,3.25) 3(-5.8,2.75) 4(-5.8,2.25) 5(-5.8,1.75) 6(-5.8,1.25) 7(-5.8,0.75) 8(-5.8,0.25) 9(-5.8,-0.25) 10(-5.8,-0.75) 11(-5.8,-1.25) 12(-5.8,-1.75) 13(-5.8,-2.25) 14(-5.8,-2.75) 15(-5.8,-3.25) 16(-5.8,-3.75) 33(5.8,-3.75) 34(5.8,-3.25) 35(5.8,-2.75) 36(5.8,-2.25) 37(5.8,-1.75) 38(5.8,-1.25) 39(5.8,-0.75) 40(5.8,-0.25) 41(5.8,0.25) 42(5.8,0.75) 43(5.8,1.25) 44(5.8,1.75) 45(5.8,2.25) 46(5.8,2.75) 47(5.8,3.25) 48(5.8,3.75)
  oval 0.3x1.6 smd: 17(-3.75,-5.8) 18(-3.25,-5.8) 19(-2.75,-5.8) 20(-2.25,-5.8) 21(-1.75,-5.8) 22(-1.25,-5.8) 23(-0.75,-5.8) 24(-0.25,-5.8) 25(0.25,-5.8) 26(0.75,-5.8) 27(1.25,-5.8) 28(1.75,-5.8) 29(2.25,-5.8) 30(2.75,-5.8) 31(3.25,-5.8) 32(3.75,-5.8) 49(3.75,5.8) 50(3.25,5.8) 51(2.75,5.8) 52(2.25,5.8) 53(1.75,5.8) 54(1.25,5.8) 55(0.75,5.8) 56(0.25,5.8) 57(-0.25,5.8) 58(-0.75,5.8) 59(-1.25,5.8) 60(-1.75,5.8) 61(-2.25,5.8) 62(-2.75,5.8) 63(-3.25,5.8) 64(-3.75,5.8)
  silkscreen extent -5.92,-4.6 4.6,4.6, body extent -5,-5 5,5, height 1.6
SWPBS_SPDT_5X5X1 [mm] "SWITCH, PUSHBUTTON, SMD, SPDT, SKQG Series ; Height 1.5 mm ; 500,000 cycles ; 0.98N Force, SKQGAFE010"
  oval 1.4x0.8 smd mask+0.1: 1(-3,1.9) 2(-3,-1.9) 3(3,-1.9) 4(3,1.9)
  silkscreen extent -2.7,-2.7 2.7,2.7, body extent -3.2,-2.6 3.2,2.6, height 1.53
TO-263_M [mm] "D2-PAK, 4-Leads, Body 9.2x10.2mm, Pitch 2.54mm, Lead Span 15.4mm, IPC Low Density"
  rect 4.1x1.05 smd: 1(-6.35,2.54) 3(-6.35,-2.54)
  rect 9.6x10.45 smd: 4(3.6,0)
  silkscreen extent -6.48,-5.2 -1.6,5.2, body extent -2.9,-5.2 6.45,5.2, height 4.6
TTSOP-14 [mm]
  rect 1.955x0.421 smd paste+0 mask+0: 1(-2.875,1.95)
  rrect100% 1.955x0.421 smd paste+0 mask+0: 2(-2.875,1.3) 3(-2.875,0.65) 4(-2.875,0) 5(-2.875,-0.65) 6(-2.875,-1.3) 7(-2.875,-1.95) 8(2.875,-1.95) 9(2.875,-1.3) 10(2.875,-0.65) 11(2.875,0) 12(2.875,0.65) 13(2.875,1.3) 14(2.875,1.95)
  silkscreen extent -4.57,-2.5 1.4,2.5, body extent -4.35,-3 4.35,3, height 0.25
USB_B_ST [mm] "CONN, USB B, Receptacle, STRAIGHT, THD"
  rect 1.6x2 hole 0.9: 1(-1.25,-1.6)
  oval 1.6x2 hole 0.9: 2(1.25,-1.6) 3(1.25,1.6) 4(-1.25,1.6)
  oval 2.4x4 hole 1.2 slot 2.8 at 90 deg: SH1(-6.02,1.15) SH2(6.02,1.15)
  oval 3.6x2.4 hole 1.2 slot 2.4 at 0 deg: SH3(0,5.56) SH4(0,-5.63)
  silkscreen extent -6.02,-5.73 6.02,5.73, body extent -7.55,-5.65 7.55,5.85, height 15.8
USBC_SMD_16_DX07S016JA1 [mm] "CONN, USB, Type C, DX07S016JA1, popular*"
  rrect50% 0.5x1 smd mask+0.075: A1B12(3.1,0) A4B9(2.35,0) B1A12(-3.1,0) B4A9(-2.35,0)
  rrect50% 0.3x1 smd mask+0.075: A5(1.25,0) A6(0.25,0) A7(-0.25,0) A8(-1.25,0) B5(-1.75,0) B6(-0.75,0) B7(0.75,0) B8(1.75,0)
  oval 1x2.4 hole 0.6 slot 1.8 at 90 deg: SH1(-4.3,4.3) SH2(4.3,4.3)
  oval 1x2 hole 0.6 slot 1.6 at 90 deg: SH3(-4.3,0.4) SH4(4.3,0.4)
  round 0.7 hole 0.7 unplated: ""(-2.99,1.12) ""(2.99,1.12)
  silkscreen extent -4.5,1.6 4.5,6.8, body extent -4.47,-0.2 4.47,6.7, height 3.18
WF_4 [mm] "DS1070  WF, Cvilux CI31 pitch 2.54mm"
  oct 2x2 hole 1: 1(-3.81,0)
  round 2 hole 1: 2(-1.27,0) 3(1.27,0) 4(3.81,0)
  silkscreen extent -5.2,-2.55 5.2,3.5, body extent -5.08,-2.4 5.08,3.4, height 11.56
XTL_4_3225 [mm] "CRYSTAL OSCILATOR 3.2X2.5mm, ABM8, CDFN-4"
  rrect50% 1.2x1.4 smd: 1(-1,1.1) 2(-1,-1.1) 3(1,-1.1) 4(1,1.1)
  Top Layer pour cut-out: -1.6,1.8 -1.6,-1.8 1.6,-1.8 1.6,1.8
  silkscreen extent -1.6,-1.7 1.4,2.2, body extent -1.25,-1.6 1.25,1.6, height 0.61

## Part data
C1 C2 C3 C4 C7 C10 C11 C13 C16 C17 C29 C30 C31 C32 C33 C34 C35 C36 C37 C38 C39 C40 C41 C42 C43 C44 C45 C46 C47 C48 C49 C50 C51 C52 C53 C54 C55 C56 C57 C58 C59 C60 C61 C62: library part CAP_SMD_MLCC, "CAP, MLCC", ASSEMBLY=ASSEMBLY, DESC="CAP, MLCC, 1nF, 50V, C0G, 10%, 0402", MANF=Murata, MANF_P#=MANF_PART#, PARAM="C0G, 10%", PARAM2=50V, PRICE="100= 1$"
C5 C6 C21 C26: library part CAP_SMD_EL_470uF_35v, "CAP, SMD, ELEC,", ASSEMBLY=ASSEMBLY, DESC=DESCRIPTION, DIST#=MOUSER, MANF=MANF, MANF_P#=MANF_PART#, PARAM=20%, PARAM2=35v, PRICE="10= -$"
C8 C9 C12 C14 C15 C18 C19 C20 C22 C23 C24 C25 C27 C28: library part CAP_SMD_MLCC_1206, "CAP, MLCC", ASSEMBLY=ASSEMBLY, MANF=-, MANF_P#=MANF_PART#, PARAM="-, -%", PARAM2=-V, PRICE="100= 1$"
C63: library part CAP_SMD_MLCC_0805, "CAP, MLCC", ASSEMBLY=ASSEMBLY, MANF=-, MANF_P#=MANF_PART#, PARAM="-, -%", PARAM2=-V, PRICE="100= 1$"
D1 D2 D3 D4 D20 D23 D24 D25 D26: library part DIODE_SMD_SCHOTTKY_SS34, "DIODE, SCHOTTKY, 20V, 3A", ASSEMBLY=ASSEMBLY, DESC=DESCRIPTION, MANF=VISHAY, MANF_P#=SS34, PARAM=20V, PARAM2=3A, PRICE=PRICE
D5 D6 D9 D10: library part LED_SMD_1206_YLW, "LED, SMD, 1206, YELLOW", ASSEMBLY=ASSEMBLY, DESC=DESCRIPTION, MANF=MANF, MANF_P#=MANF_PART#, PARAM2=2.2V, PRICE=36t@Javan
D7 D8 D11 D12: library part LED_SMD_1206_RED, "LED, SMD, 1206, RED", ASSEMBLY=ASSEMBLY, DESC=DESCRIPTION, MANF=MANF, MANF_P#=MANF_PART#, PARAM2=2.2V, PRICE=36t@Javan
D13 D14: library part TVS, "TVS DIODE", ComponentLink2Description=Datasheet, ComponentLink2URL=https://www.bourns.com/docs/Product-Datasheets/SMBJ.pdf, Direction=Bidirectional, Reverse Standoff Voltage=20V
D15: library part Zener-SOD-80
D16 D17 D18: library part LED_SMD_1206_GRN, "LED, SMD, 1206, GREEN", ASSEMBLY=ASSEMBLY, DESC=DESCRIPTION, MANF=-, MANF_P#=-, PARAM=20mA, PARAM2=2.2V, PRICE=36t@Javan
D19 D21 D22: library part DIODE_SMD_1N4148_SOD80, "DIODE, FAST SWTICHING, 0.3A, 0.5W", ASSEMBLY=ASSEMBLY, DESC=DESCRIPTION, MANF=MANF, MANF_P#=1N4148, PARAM=75V, PARAM2="300mA, 0.5W", PRICE=PRICE
F1: library part FUSE_3A_1206_SLOW, "Fuse, 3A, 32VDC, 1206, SMD, Slow Blow", MANF=Bourns, MANF_P#=SF-1206SP300-2, PARAM="3A; 32VDC; Slow Blow", PARAM2=0.027Ohm, PRICE=0.9$
F2: library part "Fuse 5x20 with holdeer pins", "Fuses 5x20", Data=28-12-2016, Desc.="fuse with holder pins 5x20", Designer="Abbas Basereh"
FB1 FB2 FB3: library part FBEAD_SMD, "FERRITE_Bead, SMD", MANF=MURATA, MANF_P#=BLM15AG121SN1D, PARAM=120@100MHz, PARAM2=1A
H1 H2 H3 H4: library part MOUNT-HOLE, "MOUNTING HOLE with drill center marker"
J1: library part CONN_MSTB_6, "CONN, PHOENIX MSTB, 5-G, 5.08mm pitch", PARAM=12A, PARAM2=320V
J2: library part CONN_MSTB_8, "CONN, PHOENIX MSTB, 5-G, 5.08mm pitch", PARAM=12A, PARAM2=320V
J3: library part CONN_MSTB_4, "CONN, PHOENIX MSTB, 5-G, 5.08mm pitch", PARAM=12A, PARAM2=320V
J4 J6: "1803358 Header; 8 A; 160 V; 3.81; 10; Soldering; 1.2 mm; 2.5 kV; 160/250 V; PBT", Color=Green, Current=8A, Flammability Rating="UL94 V-0", Test Voltage=2.5kV, Voltage=300V, Voltage Rating=160V, Voltage Rating (DC)=640mV, Approvals="CSA, UL", Connector Type=Plug, Contact Gender=Male, Contact Material=Tin, Contact Plating=Tin, Current Rating=8A, Depth=9.2mm, Gender=Male, Height=7.4mm, Housing Color=Green, Housing Material=Polybutylene, Lead Free="Lead Free", Lead Pitch=3.81mm, Length=39.49mm, Max Current Rating=8A, Mount="Through Hole", NexarPartId=71670, Number of Contacts=10, Number of Levels=1, Number of Poles=10, Number of Positions=10, Number of Positions Per Level=10, Number of Rows=1, Orientation="Right Angle", Pitch=3.81mm, RoHS=Compliant, Termination=Solder, Voltage Rating (AC)=160V, Weight=113.398093g, Width=39.49mm
J5: library part CONN_MSTB_10, "CONN, PHOENIX MSTB, 5-G, 5.08mm pitch", PARAM=12A, PARAM2=320V
J7: library part CONN_USBC_SMD_16_DX07S016JA1, "CONN, USB, Type C, USB 2.0, Right-Angle, SMD", MANF=JAE, MANF_P#=DX07S016JA1R1500, PARAM=5A, PRICE=1.5$
J8: "CONN, SWD, ST"
PUSB1: library part CONN_USB_B_ST, "CONN, USB, B, STRAIGHT, THD", MANF=-, MANF_P#=-
Q1 Q3 Q5 Q7: library part CMP-00278-87655068-1, "ISL9V5045S3ST-F085 Trans IGBT Chip N-CH 445V 51A 300000mW Automotive 3-Pin(2+Tab) D2PAK T/R", Case/Package=TO-263-3, Clamping Voltage=450V, Collector Emitter Breakdown Voltage=480V, Collector Emitter Saturation Voltage=1.25V, Collector Emitter Voltage (VCEO)=1.6V, Continuous Collector Current=51A, Max Junction Temperature (Tj)=175°C, Max Power Dissipation=300W, Min Operating Temperature=-40°C, Element Configuration=Single, Height=5.08mm, Lead Free="Lead Free", Max Breakdown Voltage=480V, Max Collector Current=51A, Max Operating Temperature=175°C, Mount="Surface Mount", NexarPartId=87655068, Number of Pins=3, Power Dissipation=300W, RoHS=Compliant, Schedule B="8541290080, 8541290080", Turn-Off Delay Time=10.8µs, Turn-On Delay Time=700ns, Weight=1.31247g
Q2 Q4 Q6 Q8: library part "IGNITION IGBT", "IGNITION IGBT", Case/Package=DPAK, Clamping Voltage=400V, Collector Emitter Saturation Voltage=1.15V, Collector Emitter Voltage (VCEO)=1.5V, Max Collector Current=41A, Max Operating Temperature=175°C, Max Power Dissipation=150W, Min Operating Temperature=-55°C, Collector Emitter Breakdown Voltage=400V, Element Configuration=Single, Max Breakdown Voltage=400V, Mount="Surface Mount", NexarPartId=87655026, Number of Pins=3, Radiation Hardening=No, RoHS=Compliant, Schedule B="8541290080, 8541290080|8541290080, 8541290080|8541290080|8541290080, 8541290080|8541290080|8541290080|8541290080", Weight=260.37mg
Q9 Q10: library part MOSP_IRF4905_D2PAK, "HEXFET Power MOSFET", ASSEMBLY=ASSEMBLY, MANF_P#=IRF4905
Q11 Q12 Q13 Q14: library part PNP_S8550_SOT23, "BJT, PNP, 25v, 0.5A, SMD, SOT23", MANF=-, MANF_P#=S8550, PARAM="25v, 0.5A", PARAM2=300mW
Q15: library part ULN2003_SOP16, "Darlington, 7-CH, 50V, 0.5A", MANF=DIODES, MANF_P#=ULN2003A, PARAM="7-CH, 50V, 0.5A", PARAM2=-
Q16 Q17 Q18 Q19: library part MOSN_IRFR3709_DPAK, "MOSFET, N-CH, 30V, 86A, 6.5mRDS, 2300pF", ASSEMBLY=ASSEMBLY, DESC="HEXFET Power MOSFET", MANF_P#=IRFR3709Z, PARAM="86A, 6.5mRDS, 2300pF, -55~175oC", PARAM2="30VDS, 1.3~2.2VGSth", PRICE=1500t@PAYA
R1 R2 R3 R4 R5 R6 R7 R8 R9 R10 R11 R12 R13 R14 R15 R16 R17 R18 R19 R20 R21 R22 R23 R24 R25 R26 R27 R28 R29 R30 R31 R32 R33 R52 R55 R68 R125 R126 R127 R128 R129 R130 R131 R132 R133 R134 R135 R136 R137 R138 R139 R140 R141 R142 R143 R144 R145 R146 R147: library part RES_SMD_0805, "RESISTOR, SMD", ASSEMBLY=ASSEMBLY, DESC=DESCRIPTION, DIST#=MOUSER, MANF=-, MANF_P#=-, PARAM=-W, PARAM2=1%, PRICE="100= 0.5$"
R34 R35 R36 R37 R38 R39 R40 R41 R42 R43 R44 R45 R46 R47 R48 R49 R50 R51 R53 R54 R56 R57 R58 R59 R60 R61 R62 R63 R64 R65 R66 R67 R69 R70 R71 R72 R73 R74 R75 R76 R77 R78 R79 R80 R81 R82 R83 R84 R85 R86 R87 R88 R89 R90 R91 R92 R93 R94 R97 R98 R99 R100 R101 R102 R103 R104 R105 R106 R107 R108 R109 R110 R113 R114 R115 R116 R117 R118 R119 R120 R121 R122 R123 R124: library part RES_SMD, "RESISTOR, SMD", ASSEMBLY=ASSEMBLY, DESC=DESCRIPTION, DIST#=MOUSER, MANF=-, MANF_P#=-, PARAM=-W, PARAM2=1%, PRICE="100= 0.5$"
R95 R96 R111 R112: library part RES_THD_POT_7X5, "RESISTOR, THD, Potentiometer"
SW1 SW2: library part SWPBS_SPDT_5X5PTS, "SWITCH, PUSH BUTTON, TACTILE, SMD, SPDT, 5X5MM", ASSEMBLY=ASSEMBLY, DESC=DESCRIPTION, MANF=CHINA, MANF_P#=PTS526SM15SMTR2LFS, PARAM=50mA, PARAM2=500kCycle, PRICE=-
T1 T2 T3 T4: library part MOSN_NTD20N06_DPAK, "MOSFET, N-CH, 60V, 20A, 39mRDS, 1~2VGSth", ASSEMBLY=ASSEMBLY, MANF=ON, MANF_P#=NTD20N06L, PARAM="20A, 39mRDS, Cin700pF, -55~150oC", PARAM2="60VDS, 1~2VGSth", PRICE=0.9$
U1 U2 U3 U4 U15 U16: library part MOS_DUAL_TC4427, "power Mosfet Driver, Dual, High-Speed, 1.5A", ASSEMBLY=ASSEMBLY, MANF_P#=TC4427
U5: library part CMP-0244-00213-1, "Positive Voltage Regulator, 3-Pin D2PAK, Tape and Reel", ComponentLink1Description="Manufacturer URL", ComponentLink1URL=http://www.st.com, ComponentLink2Description=Datasheet, ComponentLink2URL=http://www.st.com/internet/com/TECHNICAL_RESOURCES/TECHNICAL_LITERATURE/DATASHEET/CD00000444.pdf, DatasheetVersion=16/11/2011, PackageDescription="3-Pin Transistor Outline Package 2.54 mm Pitch, 15.4 mm Lead Span (D2PAK)", PackageReference=TO-263, PackageVersion=2011
U6 U7: library part VREG_1086_TO252, "REG, Linear, LDO1.3, Adj, 1A, TO-252", MANF=ST, MANF_P#="LD1086DTTR, LD1086D2MTR", PARAM=1A, PARAM2="2.8~30VIN, 1.3VDROP, 1.25VREF"
U8 U9: library part TLE7209, "IC MOTOR DRIVER 3.5V-5.5V 20DSO", Max Operating Temperature=150°C, Max Supply Voltage=28V, Min Operating Temperature=-40°C, Output Current=5A, Halogen Free="Halogen Free", Interface=SPI, Lead Free="Contains Lead", Logic Function="AND GATE", Mount="Surface Mount", Packaging="Tape and Reel", RoHS Compliant=Yes, Series=-
U10 U12 U13 U14: library part TLV9064, "IC CMOS 4 CIRCUIT 14TSSOP", Case/Package=TSSOP, Input Bias Current=0.5pA, Input Offset Voltage (Vos)=300uV, Max Operating Temperature=125°C, Min Operating Temperature=-40°C, Operating Supply Current=538uA, Output Current per Channel=50mA, Gain Bandwidth Product=10MHz, Mount="Surface Mount", Number of Channels=4, Number of Circuits=4, Number of Pins=14, Packaging="Tape and Reel", RoHS Compliant=Yes, Slew Rate=6.5V/µs
U11: "ARM Cortex-M4 32-bit MCU+FPU, 105 DMIPS, 256 kB Flash, 64 kB Internal RAM, 48 I/Os, 64-pin LQFP, -40 to 85 degC, Tray", I/Os (High Current)=48, Manufacturer=STMicroelectronics, Operating Frequency(F) (Processor speed) (MHz)=84, Supply Voltage(Vcc) max (V)=3.6, Supply Voltage(Vcc) min (V)=1.8, ComponentLink1Description="Manufacturer URL", ComponentLink1URL=http://www.st.com/web/en/home.html, ComponentLink2Description=Datasheet, ComponentLink2URL=http://www.st.com/st-web-ui/static/active/en/resource/technical/document/data_brief/DM00071938.pdf, ComponentLink3Description="Package Specification", ComponentLink3URL=http://www.st.com/st-web-ui/static/active/en/resource/technical/document/datasheet/DM00037051.pdf, Core="ARM Cortex-M4", DatasheetVersion="Rev. 1", FLASH Size (Prog) (kB)=256, Internal RAM Size (kB)=64, Mounting Technology="Surface Mount", PackageDescription="64-Pin Low Profile Quad Flat Package, 10 x 10 mm Body, 0.5 mm Pitch", PackageReference=LQFP64, PackageVersion="Rev. 4, 06/2013", Packing=Tray, PartNumber=STM32F401RCT6
U17: library part INA826, "IC INST AMP 1 CIRCUIT 8SOIC", Case/Package=D, Input Bias Current=65nA, Input Offset Voltage (Vos)=150uV, Input Resistance=100kR, Input Voltage Noise Density="18nV/sqrt Hz", Max Dual Supply Voltage=18V, Max Operating Temperature=125°C, Max Supply Voltage=36V, Min Dual Supply Voltage=1.35V, Min Operating Temperature=-40°C, Min Supply Voltage=2.7V, Nominal Supply Current=200uA, Output Current=16mA, Package Quantity=1, Power Supply Rejection Ratio (PSRR)=100dB, Voltage Gain=60dB, -3db Bandwidth=1MHz, Bandwidth=1MHz, Common Mode Rejection Ratio=84dB, Lead Free="Lead Free", Number of Amplifiers=1, Number of Channels=1, Number of Circuits=1, Number of Elements=1, Number of Pins=8, Operating Supply Current=200uA, Output Current per Channel=16mA, Packaging="Tape and Reel", Quiescent Current=200uA, Radiation Hardening=No, REACH SVHC="No SVHC", RoHS Compliant=Yes, Series=-, Slew Rate=1V/µs, Supply Current=200uA
X1: library part XTL_4_25MHZ_3225A_2, "CRYSTAL 25.00 MHZ 4pF, 10PPM", ASSEMBLY=ASSEMBLY, DESC=DESCRIPTION, DIST#=MOUSER, MANF=ABRACON, MANF_P#=ABM8W-25.0000MHZ-4-D1X-T3, PARAM="10PPM, 4pF, -40~85oC", PARAM2=0.6$, PRICE=PRICE

## Via types
v1: diameter 0.6, hole 0.4, Top Layer to Bottom Layer, 445 vias
v2: diameter 0.7, hole 0.4, Top Layer to Bottom Layer, 59 vias